# Altium PCB Test (2).PcbDoc (part 1 of 4)
Units mm, origin at the board's own origin, x right, y up, seen from the top; angles counter-clockwise.
Board outline 152.4 x 101.6 mm, 2 copper layers (Top Layer, Bottom Layer); 1 components, 0 nets, 300 pads, 1 vias.
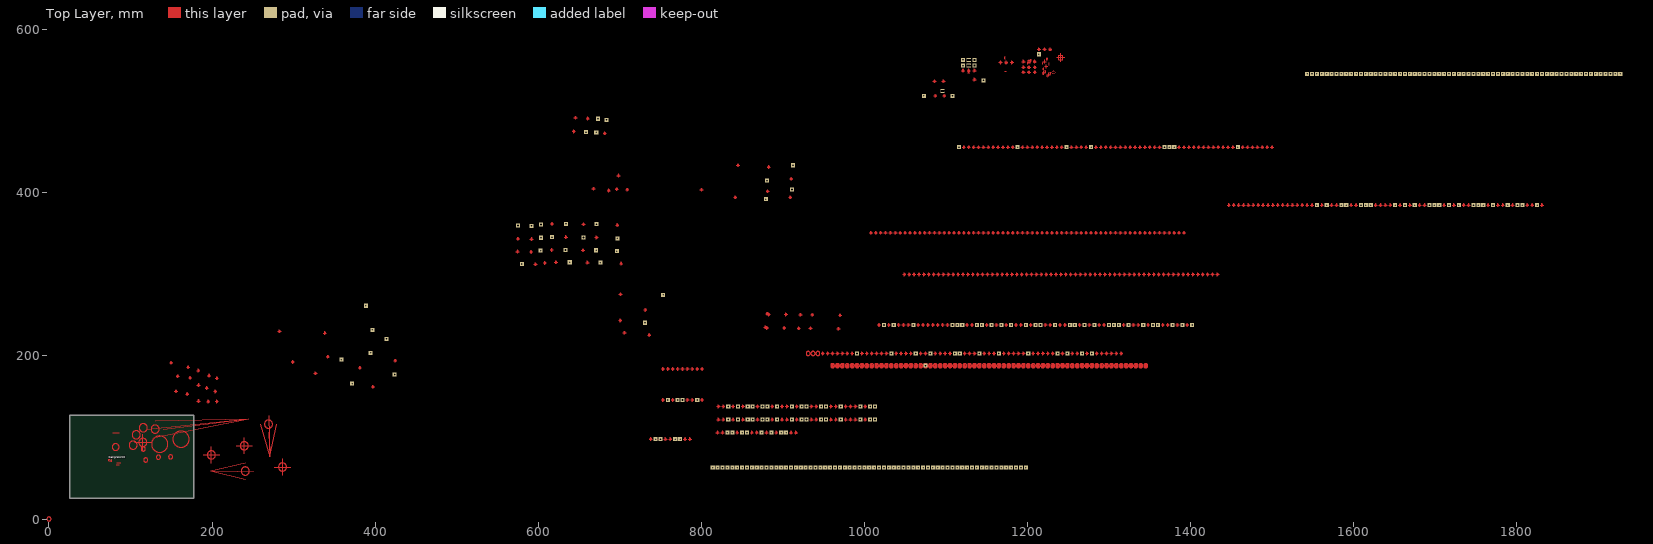
[diagram p0: Top Layer view]
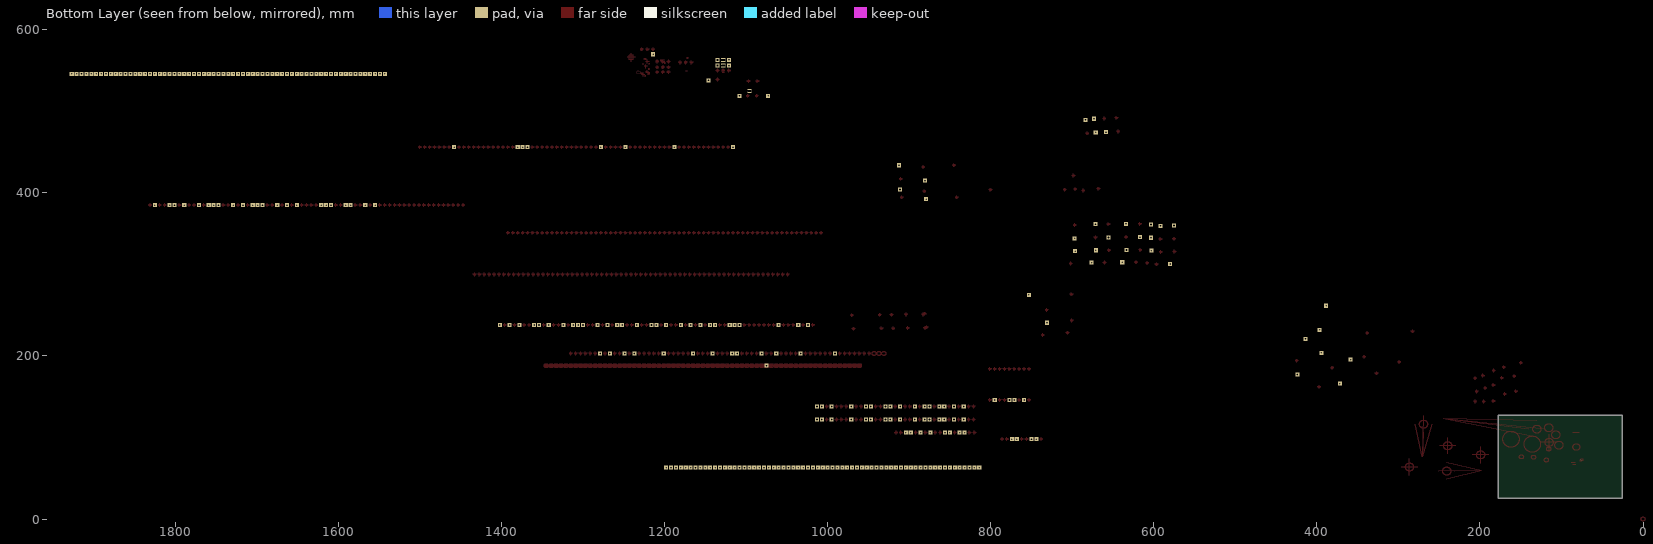
[diagram p1: Bottom Layer view, seen from below]

## Layer stack, top to bottom
Top Solder: solder mask 0.0102, Solder Resist, Dk 3.5
Top Layer: signal copper 0.0356
Dielectric 1: dielectric 0.32, FR-4, Dk 4.8
Bottom Layer: signal copper 0.0356
Bottom Solder: solder mask 0.0102, Solder Resist, Dk 3.5

## Board outline
25.4,25.4 177.8,25.4 177.8,127 25.4,127

## Design rules (kind name [scope] priority, off if disabled: settings)
Clearance [All] p1: gap=0.254
PolygonConnect [All] p1: connectstyle=Relief reliefconductorwidth=0.254 reliefentries=4 polygonreliefangle="90 Angle" airgapwidth=0.254
RoutingVias [All] p1: holewidth=0.711 width=1.27 viastyle="Through Hole" minholewidth=0.711 minwidth=1.27 maxholewidth=0.711 maxwidth=1.27
SolderMaskExpansion [All] p1: expansion=0.102
Width [All] p1: maxlimit=5 minlimit=2539.975 preferedwidth=0.254 toplayer_minwidth=0 bottomlayer_minwidth=0 minimp=50.000000 maximp=50.000000 favimp=50.000000
29 further rules are at their usual default settings.

## Components (designator, comment, footprint, x,y, rotation, side; value= is the part's Value field where it differs from the comment)
Designator20 "Comment" TEST 73.152,71.374 r0 top

## Footprints (in the part's own frame and the unit in brackets; to place one, negate y for a bottom-side part, rotate by r counter-clockwise, add the part's x,y. Pads: shape width x height; smd on the part's side, far side on the other; paste and mask are expansions set on the pad)
TEST [mm]
  rect 0.2x0.25 smd: 0(0.635,1.27) 1(1.27,1.27)
  Top Layer circle w0.2: c3.175,0 r0.741
  Top Layer lines w0.2: 0,0 3.175,0 ccw(c2.222,0.953) 3.175,1.905 0,1.905 0,0

## Free pads (board coordinates)
  rect 5x5 hole 2: 0(1073,519) 0(1121,556) 0(1121,563) 0(1214,570) 1(358.648,195.453) 1(1108,519) 1(1146,538) 3(394.462,203.835) 4(388.62,261.493) 9(371.729,165.989) 11(423.926,177.165) 13(413.893,220.853) 14(396.494,232.029) 15(575.183,359.918) 15(591.82,359.537) 15(603.377,361.188) 15(633.984,361.95) 15(671.449,361.569) 15(753.237,274.955) 16(603.377,344.932) 16(616.966,345.694) 16(655.574,345.313) 16(696.976,344.17) 17(602.869,329.184) 17(633.476,329.946) 17(670.941,329.565) 17(696.468,328.422) 17(730.885,240.665) 18(579.882,312.801) 18(638.683,314.833) 18(676.148,314.452) 19(673.354,490.855) 19(683.768,489.585) 19(912.495,433.832) 20(658.622,474.472) 20(671.195,474.218) 20(880.491,415.036) 21(911.225,404.114) 22(879.221,392.303) 23(814,63) 23(1116,456) 23(1543,546) 24(744,98) 24(750,98) 24(759,146) 24(768,98) 24(771,146) 24(774,98) 24(777,146) 24(795,146) 24(820,63) 24(826,63) 24(832,63) 24(832,106) 24(833,122) 24(833,138) 24(838,63) 24(838,106) 24(844,63) 24(845,122) 24(845,138) 24(850,63) 24(850,106) 24(856,63) 24(856,106) 24(857,122) 24(857,138) 24(862,63) 24(863,122) 24(863,138) 24(868,63) 24(874,63) 24(874,106) 24(875,122) 24(875,138) 24(880,63) 24(881,122) 24(881,138) 24(886,63) 24(886,106) 24(892,63) 24(893,122) 24(893,138) 24(898,63) 24(898,106) 24(904,63) 24(904,106) 24(910,63) 24(911,122) 24(911,138) 24(916,63) 24(922,63) 24(923,122) 24(923,138) 24(928,63) 24(929,122) 24(929,138) 24(934,63) 24(940,63) 24(946,63) 24(947,122) 24(947,138) 24(952,63) 24(953,122) 24(953,138) 24(958,63) 24(964,63) 24(970,63) 24(971,122) 24(971,138) 24(976,63) 24(982,63) 24(988,63) 24(991,203) 24(994,63) 24(995,122) 24(995,138) 24(1000,63) 24(1006,63) 24(1007,122) 24(1007,138) 24(1012,63) 24(1013,122) 24(1013,138) 24(1018,63) 24(1024,238) 24(1024,63) 24(1030,63) 24(1033,203) 24(1036,238) 24(1036,63) 24(1042,63) 24(1048,63) 24(1054,63) 24(1060,238) 24(1060,63) 24(1063,203) 24(1066,63) 24(1072,63) 24(1075,188) 24(1078,63) 24(1081,203) 24(1084,63) 24(1090,63) 24(1096,63) 24(1102,63) 24(1108,238) 24(1108,63) 24(1111,203) 24(1114,238) 24(1114,63) 24(1117,203) 24(1120,238) 24(1120,63) 24(1126,63) 24(1132,63) 24(1138,238) 24(1138,63) 24(1141,203) 24(1144,238) 24(1144,63) 24(1150,63) 24(1156,238) 24(1156,63) 24(1162,63) 24(1165,203) 24(1168,238) 24(1168,63) 24(1174,63) 24(1180,238) 24(1180,63) 24(1186,63) 24(1188,456) 24(1192,63) 24(1198,238) 24(1198,63) 24(1201,203) 24(1210,238) 24(1216,238) 24(1234,238) 24(1237,203) 24(1248,456) 24(1249,203) 24(1252,238) 24(1258,238) 24(1267,203) 24(1270,238) 24(1278,456) 24(1279,203) 24(1282,238) 24(1300,238) 24(1306,238) 24(1312,238) 24(1324,238) 24(1342,238) 24(1354,238) 24(1360,238) 24(1368,456) 24(1374,456) 24(1378,238) 24(1380,456) 24(1390,238) 24(1402,238) 24(1458,456) 24(1549,546) 24(1555,385) 24(1555,546) 24(1561,546) 24(1567,385) 24(1567,546) 24(1573,546) 24(1579,546) 24(1585,385) 24(1585,546) 24(1591,385) 24(1591,546) 24(1597,546) 24(1603,546) 24(1609,385) 24(1609,546) 24(1615,385) 24(1615,546) 24(1621,385) 24(1621,546) 24(1627,546) 24(1633,546) 24(1639,546) 24(1645,546) 24(1651,546) 24(1651,385) 24(1657,546) 24(1663,546) 24(1663,385) 24(1669,546) 24(1675,546) 24(1675,385) 24(1681,546) 24(1687,546) 24(1693,546) 24(1693,385) 24(1699,546) 24(1699,385) 24(1705,546) 24(1705,385) 24(1711,546) 24(1717,546) 24(1717,385) 24(1723,546) 24(1729,546) 24(1729,385) 24(1735,546) 24(1741,546) 24(1747,385) 24(1747,546) 24(1753,385) 24(1753,546) 24(1759,385) 24(1759,546) 24(1765,546) 24(1771,385) 24(1771,546) 24(1777,546) 24(1783,546) 24(1789,385) 24(1789,546) 24(1795,546) 24(1801,385) 24(1801,546) 24(1807,385) 24(1807,546) 24(1813,546) 24(1819,546) 24(1825,385) 24(1825,546) 24(1831,546) 24(1837,546) 24(1843,546) 24(1849,546) 24(1855,546) 24(1861,546) 24(1867,546) 24(1873,546) 24(1879,546) 24(1885,546) 24(1891,546) 24(1897,546) 24(1903,546) 24(1909,546) 24(1915,546) 24(1921,546) 24(1927,546)
  rect 5x5 hole 2 slot 5 at 0 deg: 0(1096,525) 0(1128,556) 0(1128,563)
  rect 0x0 hole 2 slot 3 at 0 deg: 0(1232,547.5)
  rect 5x5 hole 2 square: 1(1135,556) 1(1135,563)
  rect 5x5 hole 5 square: 1(1230,558)

## Via types
v1: diameter 0.9, hole 0.4, Top Layer to Bottom Layer, 1 vias

## Nets (pads, with @x,y where several pads share a name; then routed paths per layer and width w, separated by ;. In a path a pad name is that pad's centre, name@x,y a point inside that pad or via, vN(x,y) a via of type N, cw(c..) or ccw(c..) an arc to the next point about the centre after c; other vN are vias at no path point)
pads on no net: Designator20.0 Designator20.1
copper on no net: | length 16954.3